# EAGLE board Mighty Blorr-Allis (EAGLE 7.6.0)

Size 73.58 x 63.39 mm. Coordinates in mm from the lower left corner, seen from the top.
Outline: 0,0 56.82,0 56.82,53.33 0,53.33 0,0
Copper layers (1*16): Top 0.035mm / dielectric 1.5mm / Bottom 0.035mm
Design rules "default": minimum track width 10mil, minimum drill 24mil, track to track 8mil, track to pad 8mil, pad to pad 8mil, via to via 8mil, smd to smd 8mil, copper to edge 40mil, drill to drill 8mil, minimum pad ring 10mil, minimum via ring 8mil, stop-mask expansion 4mil, vias tented up to drill 0mil, thermal gap 10mil

## Footprints (pad centres in the part's own frame; a part is rotated, then mirrored left to right if it is on the bottom)
B25V = drill 0.813 long: A 2.54,0.635; E -2.54,0.635; S 0,0.635
1X3P-2.54-2.54-11.6-3.0-BLACK-MALE = drill 0.889 pad 1.651 square: 1 0,2.54 | drill 0.889 pad 1.651: 2 0,0; 3 0,-2.54
ARDUINO_UNO = drill 1.016 pad 1.88: 0 63.5,50.8; 1 60.96,50.8; 2 58.42,50.8; 3 55.88,50.8; 3.3V 35.56,2.54; 4 53.34,50.8; 5 50.8,50.8; 5V 38.1,2.54; 6 48.26,50.8; 7 45.72,50.8; 8 41.656,50.8; 9 39.116,50.8; 10 36.576,50.8; 11 34.036,50.8; 12 31.496,50.8; 13 28.956,50.8; A0 50.8,2.54; A1 53.34,2.54; A2 55.88,2.54; A3 58.42,2.54; A4 60.96,2.54; A5 63.5,2.54; AREF 23.876,50.8; GND 26.416,50.8; GND. 43.18,2.54; GND.. 40.64,2.54; I/OREF 30.48,2.54; N/C 27.94,2.54; RESET 33.02,2.54; SCL 18.796,50.8; SDA 21.336,50.8; VIN 45.72,2.54 | hole 3.2: 66.04,7.62; 66.04,35.56; 15.24,50.8; 13.97,2.54

## Placement (x,y rotation side)
Rpot2  250k‎Ω  [B25V]  5,86.28 0 top  (outside the outline)
Rpot3  250k‎Ω  [B25V]  5,98.98 0 top  (outside the outline)
Rpot4  250k‎Ω  [B25V]  5,111.68 0 top  (outside the outline)
Rpot5  250k‎Ω  [B25V]  5,124.38 0 top  (outside the outline)
Rpot6  250k‎Ω  [B25V]  5,137.08 0 top  (outside the outline)
SERVO1  [1X3P-2.54-2.54-11.6-3.0-BLACK-MALE]  5,22.78 0 top
SERVO2  [1X3P-2.54-2.54-11.6-3.0-BLACK-MALE]  5,35.48 0 top
SERVO3  [1X3P-2.54-2.54-11.6-3.0-BLACK-MALE]  5,48.18 0 top
SERVO4  [1X3P-2.54-2.54-11.6-3.0-BLACK-MALE]  5,60.88 0 top
SERVO5  [1X3P-2.54-2.54-11.6-3.0-BLACK-MALE]  5,73.58 0 top  (outside the outline)
U2  [ARDUINO_UNO]  5,10.08 0 top

## Library data of the parts
Rpot2-Rpot6 SERVO1-SERVO5 U2 = AUTODESK_CIRCUITS_BREADBOARD

## Nets
N$1: SERVO5.3 U2.10
N$2: SERVO3.3 U2.9
N$3: SERVO4.3 U2.6
N$4: SERVO2.3 U2.5
N$5: SERVO1.3 U2.3
N$6: Rpot2.E Rpot3.E Rpot4.E Rpot5.E Rpot6.E SERVO1.2 SERVO2.2 SERVO3.2 SERVO4.2 SERVO5.2 U2.5V
N$7: Rpot2.A Rpot3.A Rpot4.A Rpot5.A Rpot6.A SERVO1.1 SERVO2.1 SERVO3.1 SERVO4.1 SERVO5.1 U2.GND
N$8: Rpot4.S U2.A2
N$9: Rpot5.S U2.A3
N$10: Rpot2.S U2.A0
N$11: Rpot3.S U2.A1
N$12: Rpot6.S U2.A4

## Tracks (layer width: path | path; a pad name or v marks a point on that pad's centre or on a via)
N$1  (1 unrouted)
N$2  (1 unrouted)
N$3  (1 unrouted)
N$4  (1 unrouted)
N$5  (1 unrouted)
N$6  (10 unrouted)
N$7  (10 unrouted)
N$8  (1 unrouted)
N$9  (1 unrouted)
N$10  (1 unrouted)
N$11  (1 unrouted)
N$12  (1 unrouted)